# EAGLE board 4digitSSD-MAX7219CNG (EAGLE 7.6.0)
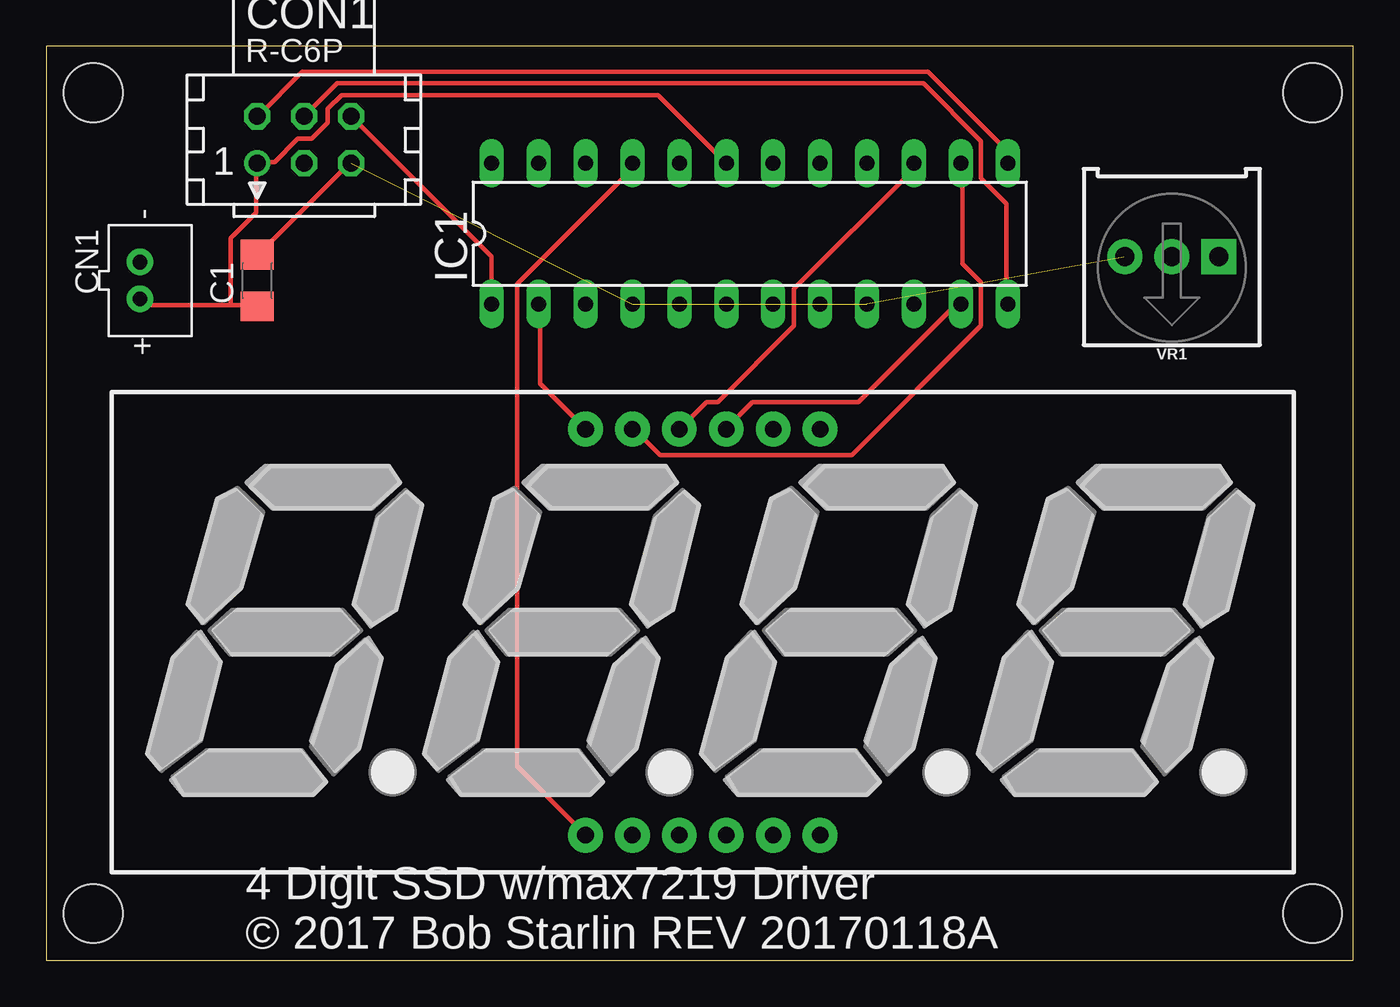
[diagram p0: board, top side]
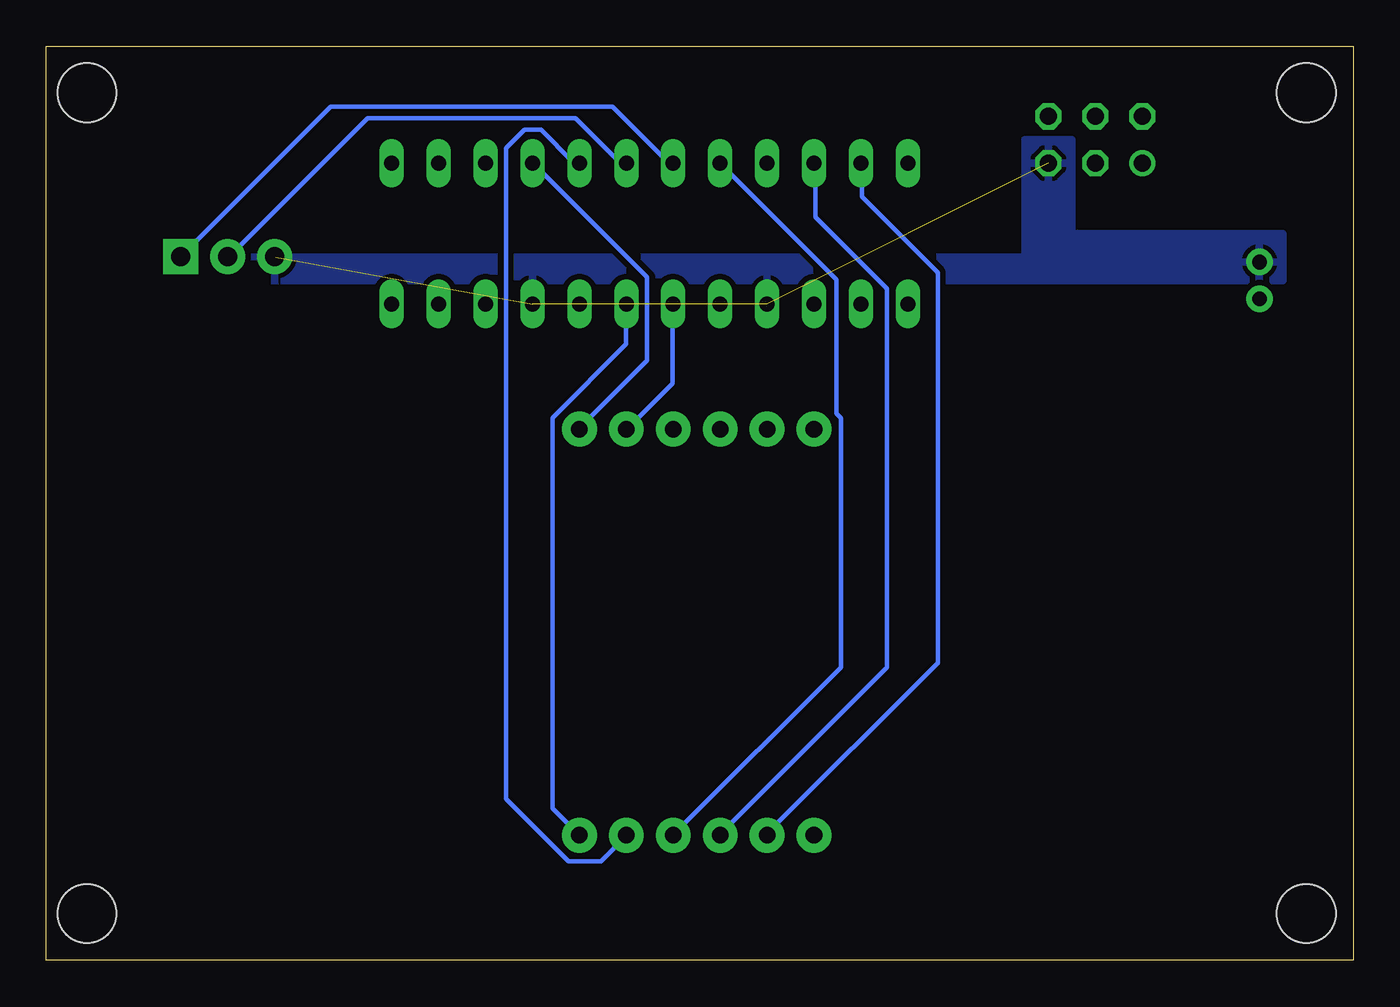
[diagram p1: board, bottom side, seen from below]

Size 70.79 x 49.52 mm. Coordinates in mm from the lower left corner, seen from the top.
Outline: 0,0 70.79,0 70.79,49.52 0,49.52 0,0
Copper layers (1*16): Top 0.035mm / dielectric 1.5mm / Bottom 0.035mm
Design rules "default": minimum track width 10mil, minimum drill 24mil, track to track 8mil, track to pad 8mil, pad to pad 8mil, via to via 8mil, smd to smd 8mil, copper to edge 40mil, drill to drill 8mil, minimum pad ring 10mil, minimum via ring 8mil, stop-mask expansion 4mil, vias tented up to drill 0mil, thermal gap 10mil
Net classes: 0 default: width 0.254 mm, drill 0.508 mm, clearance 0.305 mm
Holes 3.2 mm at 2.54,2.54 2.54,46.99 68.58,46.99 68.58,2.54

## Footprints (pad centres in the part's own frame; a part is rotated, then mirrored left to right if it is on the bottom)
C1206 = smd 1.6 x 1.8: 1 -1.4,0; 2 1.4,0
JST-PH-2-THM = drill 0.8 pad 1.422: 1 1,0; 2 -1,0
CON06 = drill 0.914: 1 -2.54,-1.27 | drill 0.914 octagon: 2 -2.54,1.27; 3 0,-1.27; 4 0,1.27; 5 2.54,-1.27; 6 2.54,1.27
DIL24-3 = drill 0.813 long: 1 -13.97,-3.81; 2 -11.43,-3.81; 3 -8.89,-3.81; 4 -6.35,-3.81; 5 -3.81,-3.81; 6 -1.27,-3.81; 7 1.27,-3.81; 8 3.81,-3.81; 9 6.35,-3.81; 10 8.89,-3.81; 11 11.43,-3.81; 12 13.97,-3.81; 13 13.97,3.81; 14 11.43,3.81; 15 8.89,3.81; 16 6.35,3.81; 17 3.81,3.81; 18 1.27,3.81; 19 -1.27,3.81; 20 -3.81,3.81; 21 -6.35,3.81; 22 -8.89,3.81; 23 -11.43,3.81; 24 -13.97,3.81
7-SEGMENT-4DIGIT-COUNTER = drill 0.9 pad 1.88: 1 -6.35,-10.998; 2 -3.81,-10.998; 3 -1.27,-10.998; 4 1.27,-10.998; 5 3.81,-10.998; 6 6.35,-10.998; 7 6.35,10.998; 8 3.81,10.998; 9 1.27,10.998; 10 -1.27,10.998; 11 -3.81,10.998; 12 -6.35,10.998
TRIMPOT-PTH-3386U = drill 1.016 pad 1.88 square: 1 -2.54,-0.015 | drill 1.016 pad 1.88: 2 0,-0.015; 3 2.54,-0.015

## Placement (x,y rotation side)
C1  .1uF  [C1206]  11.43,36.83 90 top
CN1  Aux PWR  [JST-PH-2-THM]  5.08,36.83 270 top
CON1  uC CONN  [CON06]  13.97,44.45 0 top
IC1  MAX7219CNG  [DIL24-3]  38.1,39.37 0 top
U$1  7-SEGMENT-4DIGIT-COUNTERPTH  [7-SEGMENT-4DIGIT-COUNTER]  35.56,17.78 0 top
VR1  10k  [TRIMPOT-PTH-3386U]  60.96,38.1 180 top

## Library data of the parts
C1 = rcl
CN1 = adafruit
CON1 = con-harting; OC_FARNELL: unknown; OC_NEWARK: unknown
IC1 = maxim; MF: MAXIM; MPN: MAX7219CNG; OC_FARNELL: 1523914; OC_NEWARK: 34C4018
U$1 = SparkFun-Displays
VR1 = SparkFun-Resistors; PROD_ID: RES-09730; SF_SKU: COM-09806

## Nets
A: IC1.14 U$1.11
B: IC1.16 U$1.7
C: IC1.20 U$1.4
CLK: CON1.2 IC1.13
D: IC1.23 U$1.2
D1: IC1.2 U$1.12
D2: IC1.11 U$1.9
D3: IC1.6 U$1.8
D4: IC1.7 U$1.6
DIN: CON1.6 IC1.1
DP: IC1.22 U$1.3
E: IC1.21 U$1.1
F: IC1.15 U$1.10
G: IC1.17 U$1.5
GND: C1.2 CN1.2 CON1.5 IC1.4 IC1.9 VR1.3
LOAD: CON1.4 IC1.12
N$1: IC1.18 VR1.2
VCC: C1.1 CN1.1 CON1.1 IC1.19 VR1.1

## Tracks (layer width: path | path; a pad name or v marks a point on that pad's centre or on a via)
A
  Top 0.254: IC1.14 49.62,43.12 49.62,37.75 50.62,36.75 50.62,34.38 43.62,27.38 33.25,27.38 31.75,28.88 U$1.11
B
  Bottom 0.254: IC1.16 44.38,43.12 38.25,37 38.25,32.5 41.88,28.88 U$1.7
C
  Bottom 0.254: IC1.20 34.25,43.12 28,36.88 28,29.62 27.75,29.38 27.75,15.88 36.75,6.88 U$1.4
CLK
  Top 0.254: IC1.13 52,43.25 52,43.88 47.75,48.12 13.88,48.12 11.5,45.75 CON1.2
D
  Bottom 0.254: IC1.23 26.62,43.12 26.62,41.38 22.5,37.25 22.5,16.12 31.75,6.88 U$1.2
D1
  Top 0.254: IC1.2 26.75,35.5 26.75,31.25 29.12,28.88 U$1.12
D2
  Top 0.254: IC1.11 49.5,35.5 49.25,35.5 44,30.25 38.25,30.25 36.88,28.88 U$1.9
D3
  Bottom 0.254: IC1.6 36.88,35.5 36.88,31.25 39.25,28.88 U$1.8
D4
  Bottom 0.254: IC1.7 39.38,35.5 39.38,33.38 43.38,29.38 43.38,8.25 42,6.88 U$1.6
DIN
  Top 0.254: IC1.1 24.12,35.62 24.12,38.12 16.62,45.62 CON1.6
DP
  Bottom 0.254: IC1.22 29.12,43.12 29.12,40.25 25.25,36.38 25.25,15.88 34.25,6.88 U$1.3
E
  Top 0.254: IC1.21 31.75,42.88 25.5,36.62 25.5,10.5 29.12,6.88 U$1.1
F
  Top 0.254: IC1.15 46.88,43.12 46.88,42.75 40.5,36.38 40.5,34.38 36.38,30.25 35.75,30.25 34.38,28.88 U$1.10
G
  Bottom 0.254: IC1.17 42,43.25 42.25,43.25 44,45 44.88,45 45.88,44 45.88,8.75 42.5,5.38 40.75,5.38 39.38,6.75 U$1.5
GND  (3 unrouted)
  Top 0.254: C1.2 11.5,38.25 16.5,43.25 CON1.5
  Bottom 0.254: VR1.3 58.4,38.28 58.37,38.1 | 16.48,43.31 CON1.5
  pour Bottom: 3.81,36.83 3.81,39.37 15.24,39.37 15.24,44.45 17.78,44.45 17.78,38.1 59.69,38.1 59.69,36.83
LOAD
  Top 0.254: CON1.4 15.75,47.5 47.5,47.5 50.62,44.38 50.62,42.38 52,41 52,35.62 IC1.12
N$1
  Bottom 0.254: IC1.18 39.38,43.25 39.75,43.25 42.12,45.62 53.38,45.62 60.88,38.12 VR1.2
VCC
  Top 0.254: 10,35.5 5.38,35.5 5.12,35.75 CN1.1 | 10,35.5 11.38,35.5 C1.1 | 10,35.5 10,39.12 11.38,40.5 11.38,43.12 CON1.1 11.5,43.25 12.38,43.25 13.62,44.5 14.38,44.5 15.25,45.38 15.25,46.12 16,46.88 33.12,46.88 36.75,43.25 IC1.19
  Bottom 0.254: IC1.19 36.88,43.25 37.12,43.25 40.12,46.25 55.38,46.25 VR1.1

## Text on the board
tSilk: 4 Digit SSD w/max7219 Driver / © 2017 Bob Starlin REV 20170118A